# EAGLE board LED Wall Ver 3_1 (EAGLE 6.3)
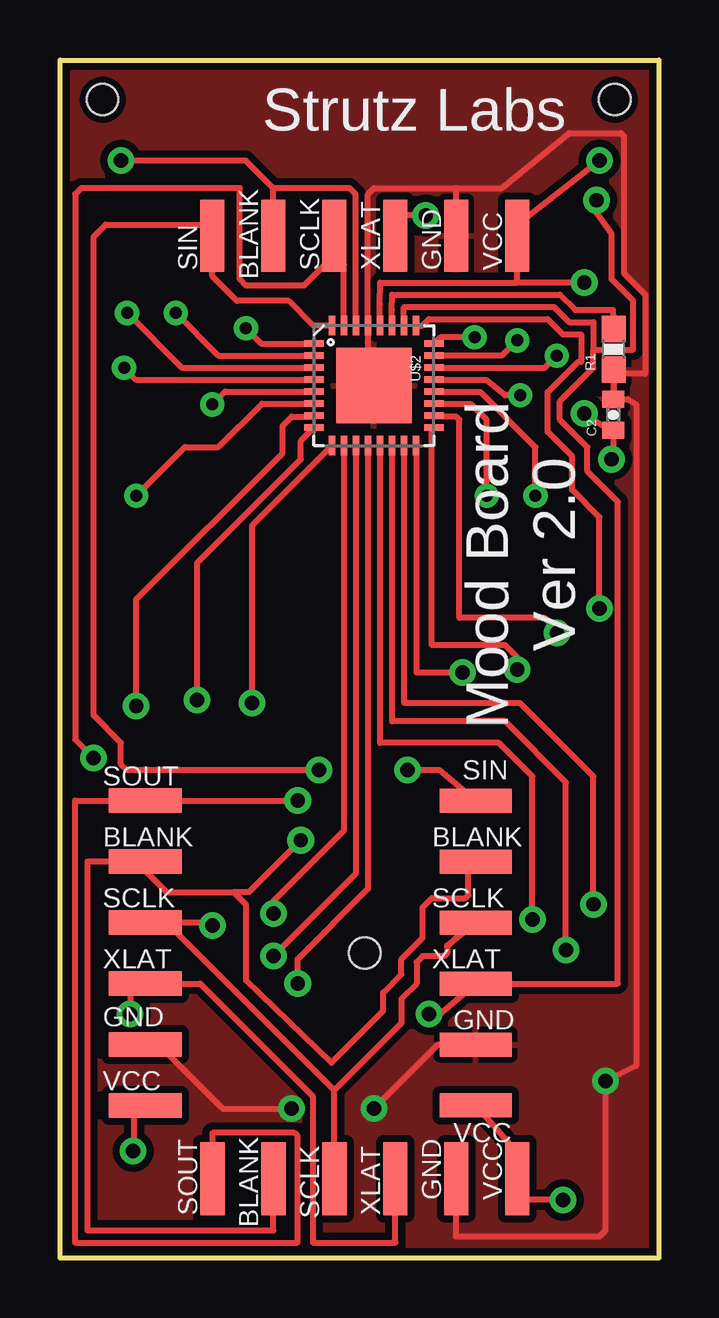
[diagram p0: board, top side]
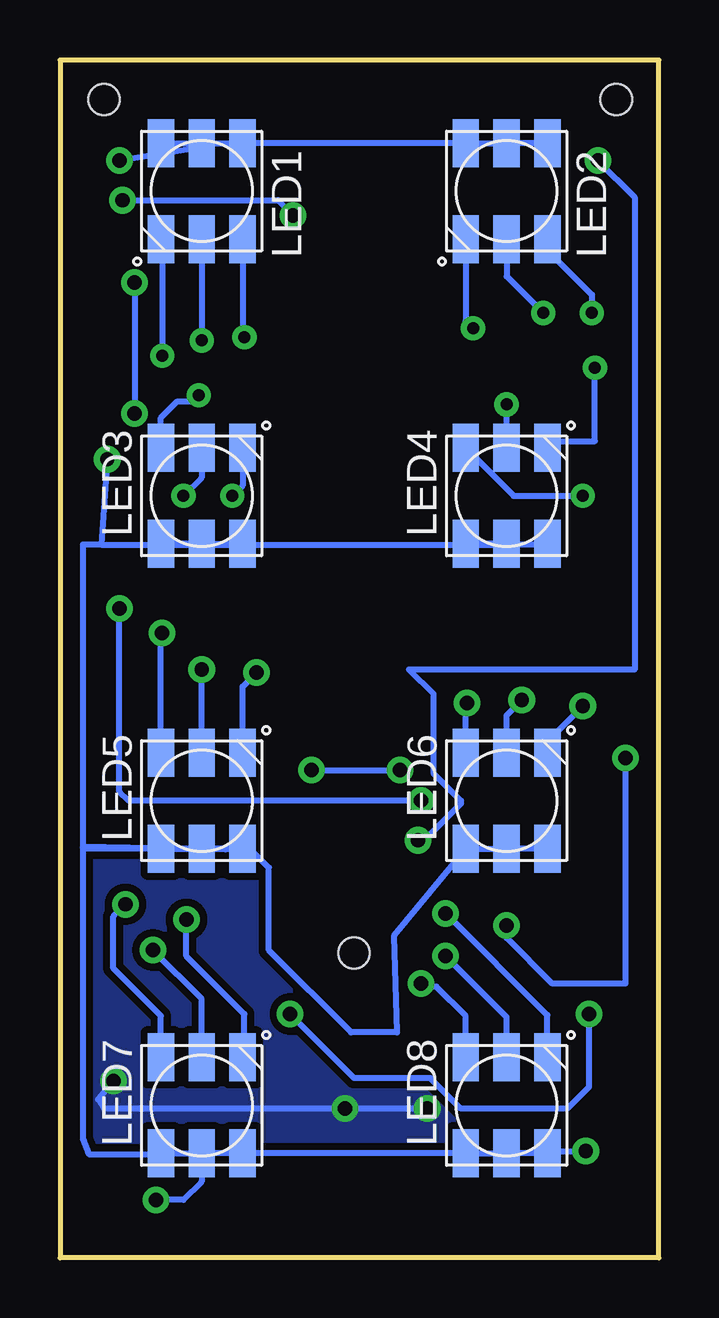
[diagram p1: board, bottom side, seen from below]

Size 24.96 x 49.91 mm. Coordinates in mm from the lower left corner, seen from the top.
Outline: 0,0 24.96,0 24.96,49.91 0,49.91 0,0
Copper layers (1*16): Top 0.035mm / dielectric 1.5mm / Bottom 0.035mm
Design rules "SparkFun": minimum track width 8mil, minimum drill 20mil, track to track 8mil, track to pad 8mil, pad to pad 8mil, via to via 8mil, smd to smd 8mil, copper to edge 8mil, drill to drill 8mil, minimum pad ring 12mil, minimum via ring 10mil, stop-mask expansion 4mil, vias tented up to drill 20mil, thermal gap 10mil
Holes 1.3 mm at 1.78,48.26 23.11,48.26 12.7,12.7

## Footprints (pad centres in the part's own frame; a part is rotated, then mirrored left to right if it is on the bottom)
0402-CAP = smd 0.7 x 0.9: 1 -0.65,0; 2 0.65,0
1X06_SMD = smd 3.048 x 1.016: P$1 0,-1.27; P$2 0,1.27; P$3 0,3.81; P$4 0,-3.81; P$5 0,-6.35; P$6 0,6.35
1X06-SMD = smd 1 x 3: 1 -6.35,5; 2 -3.81,5; 3 -1.27,5; 4 1.27,5; 5 3.81,5; 6 6.35,5
RGBLED5050 = smd 2 x 1.1: 1 -2,1.7; 2 -2,0; 3 -2,-1.7; 4 2,-1.7; 5 2,0; 6 2,1.7
0603-RES = smd 1.1 x 1: 1 -0.85,0; 2 0.85,0
QFN-32 = smd 0.285 x 0.8: 1 -1.75,-2.5; 2 -1.25,-2.5; 3 -0.75,-2.5; 4 -0.25,-2.5; 5 0.25,-2.5; 6 0.75,-2.5; 7 1.25,-2.5; 8 1.75,-2.5; 17 1.75,2.5; 18 1.25,2.5; 19 0.75,2.5; 20 0.25,2.5; 21 -0.25,2.5; 22 -0.75,2.5; 23 -1.25,2.5; 24 -1.75,2.5 | smd 0.8 x 0.285: 9 2.5,-1.75; 10 2.5,-1.25; 11 2.5,-0.75; 12 2.5,-0.25; 13 2.5,0.25; 14 2.5,0.75; 15 2.5,1.25; 16 2.5,1.75; 25 -2.5,1.75; 26 -2.5,1.25; 27 -2.5,0.75; 28 -2.5,0.25; 29 -2.5,-0.25; 30 -2.5,-0.75; 31 -2.5,-1.25; 32 -2.5,-1.75 | smd 3.15 x 3.15: EP 0,0

## Placement (x,y rotation side)
C2  0.1uF  [0402-CAP]  23.05,35.13 90 top
E$1  [1X06_SMD]  12.7,3.3 90 top
E$2  [1X06_SMD]  3.56,12.7 180 top
INPUT  [1X06-SMD]  12.32,12.7 270 top
INPUT1  [1X06-SMD]  12.7,37.59 0 top
LED1  RGBLED5050  [RGBLED5050]  19.05,44.45 270 bottom
LED2  RGBLED5050  [RGBLED5050]  6.35,44.45 270 bottom
LED3  RGBLED5050  [RGBLED5050]  19.05,31.75 90 bottom
LED4  RGBLED5050  [RGBLED5050]  6.35,31.75 90 bottom
LED5  RGBLED5050  [RGBLED5050]  19.05,19.05 90 bottom
LED6  RGBLED5050  [RGBLED5050]  6.35,19.05 90 bottom
LED7  RGBLED5050  [RGBLED5050]  19.05,6.35 90 bottom
LED8  RGBLED5050  [RGBLED5050]  6.35,6.35 90 bottom
R1  2.4k  [0603-RES]  23.06,37.86 90 top
U$2  TLC5947  [QFN-32]  13.08,36.35 270 top

## Library data of the parts
C2 = SparkFun; REFDES: R100
E$1 = Shannon; REFDES: J102
E$2 = Shannon; REFDES: J103
INPUT = SparkFun; REFDES: J101
INPUT1 = SparkFun; REFDES: J100
LED1 = adafruit; REFDES: D100
LED2 = adafruit; REFDES: D101
LED3 = adafruit; REFDES: D102
LED4 = adafruit; REFDES: D103
LED5 = adafruit; REFDES: D104
LED6 = adafruit; REFDES: D105
LED7 = adafruit; REFDES: D106
LED8 = adafruit; REFDES: D107
R1 = SparkFun-Resistors; REFDES: C100
U$2 = Shannon; REFDES: U100

## Nets
BLANK: INPUT1.2 INPUT.2 U$2.30
GND: C2.2 INPUT1.5 INPUT.5 R1.1 U$2.29 U$2.EP
N$4: LED2.4 U$2.1
N$5: LED2.5 U$2.2
N$7: LED2.6 U$2.3
N$8: LED8.4 U$2.10
N$10: LED4.5 U$2.5
N$17: LED4.4 U$2.4
N$18: LED4.6 U$2.6
N$19: LED6.4 U$2.7
N$20: LED6.5 U$2.8
N$21: LED6.6 U$2.9
N$22: LED8.5 U$2.11
N$23: LED8.6 U$2.12
N$24: LED7.4 U$2.13
N$25: LED7.5 U$2.14
N$26: LED7.6 U$2.15
N$27: LED5.4 U$2.16
N$28: LED5.5 U$2.17
N$29: LED5.6 U$2.18
N$30: LED3.4 U$2.19
N$31: R1.2 U$2.27
N$32: LED3.5 U$2.20
N$33: LED3.6 U$2.21
N$34: LED1.4 U$2.22
N$35: LED1.5 U$2.23
N$36: LED1.6 U$2.24
SCLK: INPUT1.3 INPUT.3 U$2.31
SIN: INPUT1.1 INPUT.1 U$2.32
SOUT: U$2.25
VCC: C2.1 INPUT1.6 INPUT.6 LED1.1 LED1.2 LED1.3 LED2.1 LED2.2 LED2.3 LED3.1 LED3.2 LED3.3 LED4.1 LED4.2 LED4.3 LED5.1 LED5.2 LED5.3 LED6.1 LED6.2 LED6.3 LED7.1 LED7.2 LED7.3 LED8.1 LED8.2 LED8.3 U$2.28
XLAT: INPUT1.4 INPUT.4 U$2.26

## Tracks (layer width: path | path; a pad name or v marks a point on that pad's centre or on a via)
BLANK  (via drill 0.6)
  Top 0.254: 8.89,3.1 8.89,1.14 1.14,1.14 1.14,16.51 3.17,16.51 4.45,15.24 7.24,15.24 | INPUT1.2 8.89,44.58 | U$2.30 12.32,44.32 12.06,44.58 8.89,44.58 | 7.24,15.24 7.75,14.73 7.75,11.56 11.3,8.13 13.46,10.29 13.46,11.05 14.22,11.81 14.22,12.45 15.11,13.34 15.11,14.61 15.49,14.99 16.89,14.99 17.02,15.11 17.02,16.44 INPUT.2 | 8.89,44.58 7.75,45.72 v2.54,45.72 | v10.03,17.4 7.87,15.24 7.24,15.24
  Bottom 0.254: v2.54,45.72 1.02,44.2 1.02,24.51 10.41,24.51 9.4,23.5 9.4,20.19 8.26,19.05 8.26,18.92 9.78,17.4 v10.03,17.4
GND  (via drill 0.6)
  Top 0.254: U$2.EP 12.83,36.6 U$2.29 12.83,44.33 13.08,44.58 16.51,44.58 | 4.11,8.89 6.78,6.22 v9.65,6.22 | 16.51,3.1 16.51,0.89 22.48,0.89 22.73,1.14 v22.73,7.37 24,8 24,35.56 23.66,35.78 C2.2 23.06,35.92 R1.1 23.11,36.83 24.38,36.83 24.38,40.13 23.5,41.02 23.5,46.74 23.37,46.86 21.21,46.86 18.41,44.58 16.51,44.58 | INPUT1.5 16.51,44.58 | INPUT.5 15.75,8.89 v13.08,6.22
  Bottom 0.254: v9.65,6.22 v13.08,6.22 23.11,6.22 23.37,6.6 v22.73,7.37
  pour Bottom (isolate 0.305): 0,49.91 0,0 24.96,0 24.96,49.91
  pour Top (isolate 0.305): 0,49.91 0,0 24.96,0 24.96,49.91
N$4  (via drill 0.5 pad 0.25)
  Top 0.254: v7.75,38.73 8.38,38.1 U$2.1
  Bottom 0.254: LED2.4 8.05,39.04 v7.75,38.73
N$5  (via drill 0.5 pad 0.25)
  Top 0.254: v4.83,39.37 6.6,37.6 U$2.2
  Bottom 0.254: LED2.5 6.35,40.89 v4.83,39.37
N$7  (via drill 0.5 pad 0.25)
  Top 0.254: v2.79,39.37 5.07,37.1 U$2.3
  Bottom 0.254: LED2.6 4.65,41.99 2.79,40.13 v2.79,39.37
N$8  (via drill 0.6)
  Top 0.254: U$2.10 11.83,17.8 8.89,14.86 v8.89,14.35
  Bottom 0.254: LED8.4 4.65,10.11 v8.89,14.35
N$10  (via drill 0.5 pad 0.25)
  Top 0.254: v6.35,35.56 6.89,36.1 U$2.5
  Bottom 0.254: LED4.5 v6.35,35.56
N$17  (via drill 0.5 pad 0.25)
  Top 0.254: v2.67,37.08 3.15,36.6 U$2.4
  Bottom 0.254: LED4.4 4.36,34.04 2.67,34.04 v2.67,37.08
N$18  (via drill 0.5 pad 0.25)
  Top 0.254: v3.17,31.75 5.21,33.78 6.6,33.78 8.42,35.6 U$2.6
  Bottom 0.254: LED4.6 6.05,31.75 v3.17,31.75
N$19  (via drill 0.6)
  Top 0.254: v3.17,22.99 3.17,27.43 9.27,33.53 9.27,34.67 9.65,35.05 10.54,35.05 U$2.7
  Bottom 0.254: LED6.4 4.65,21.51 v3.17,22.99
N$20  (via drill 0.6)
  Top 0.254: v5.71,23.24 5.71,28.96 10.03,33.27 10.03,34.05 U$2.8
  Bottom 0.254: LED6.5 6.35,22.61 v5.71,23.24
N$21  (via drill 0.6)
  Top 0.254: v8,23.11 8,30.52 U$2.9
  Bottom 0.254: LED6.6 8.05,23.07 v8,23.11
N$22  (via drill 0.6)
  Top 0.254: v8.89,12.57 12.33,16.01 U$2.11
  Bottom 0.254: LED8.5 6.35,10.03 v8.89,12.57
N$23  (via drill 0.6)
  Top 0.254: v9.91,11.43 9.91,12.45 12.83,15.37 U$2.12
  Bottom 0.254: LED8.6 8.05,10.08 9.27,11.3 9.78,11.3 v9.91,11.43
N$24  (via drill 0.6)
  Top 0.254: v19.68,14.1 19.68,20.07 18.29,21.46 13.34,21.46 U$2.13
  Bottom 0.254: LED7.4 17.27,8.43 17.27,10.16 19.68,12.57 v19.68,14.1
N$25  (via drill 0.6)
  Top 0.254: v21.08,12.83 21.08,19.81 18.54,22.35 13.84,22.35 13.84,33.84 U$2.14
  Bottom 0.254: LED7.5 19.05,10.79 v21.08,12.83
N$26  (via drill 0.6)
  Top 0.254: v22.23,14.73 22.23,20.07 19.18,23.11 14.35,23.11 14.35,33.83 U$2.15
  Bottom 0.254: LED7.6 20.75,10.08 22.73,12.06 22.73,14.22 v22.23,14.73
N$27  (via drill 0.6)
  Top 0.254: v16.76,24.38 14.86,24.38 14.86,33.82 U$2.16
  Bottom 0.254: LED5.4 17.35,23.8 v16.76,24.38
N$28  (via drill 0.6)
  Top 0.254: v19.05,24.51 19.05,25.02 18.54,25.53 15.49,25.53 15.49,34.51 U$2.17
  Bottom 0.254: LED5.5 v19.05,24.51
N$29  (via drill 0.6)
  Top 0.254: v20.7,26.04 20.7,26.16 20.19,26.67 16.64,26.67 16.64,34.92 16.51,35.05 15.63,35.05 U$2.18
  Bottom 0.254: LED5.6 20.75,25.99 v20.7,26.04
N$30  (via drill 0.5 pad 0.25)
  Top 0.254: v17.78,31.75 17.78,34.92 17.14,35.56 15.62,35.56 U$2.19
  Bottom 0.254: LED3.4 17.35,32.18 v17.78,31.75
N$31
  Top 0.254: U$2.27 13.83,39.48 13.84,40.13 20.83,40.13 21.46,39.5 23.04,39.5 R1.2
N$32  (via drill 0.5 pad 0.25)
  Top 0.254: v19.81,31.75 19.81,33.78 17.53,36.07 15.61,36.07 U$2.20
  Bottom 0.254: LED3.5 19.05,32.51 v19.81,31.75
N$33  (via drill 0.5 pad 0.25)
  Top 0.254: v19.18,35.94 18.54,35.94 17.78,36.58 15.6,36.58 U$2.21
  Bottom 0.254: LED3.6 20.75,35 20.07,35.69 19.43,35.69 v19.18,35.94
N$34  (via drill 0.5 pad 0.25)
  Top 0.254: U$2.22 15.59,37.08 20.19,37.08 v20.7,37.59
  Bottom 0.254: LED1.4 20.73,42.45 20.7,42.42 v20.7,37.59
N$35  (via drill 0.5 pad 0.25)
  Top 0.254: v19.05,38.23 18.41,37.59 U$2.23
  Bottom 0.254: LED1.5 v19.05,38.23
N$36  (via drill 0.5 pad 0.25)
  Top 0.254: v17.27,38.35 15.84,38.35 U$2.24
  Bottom 0.254: LED1.6 17.35,38.43 v17.27,38.35
SCLK  (via drill 0.6)
  Top 0.254: 16.13,12.95 16.13,13.01 INPUT.3 17.09,13.91 16.13,12.95 | 11.43,3.1 11.43,6.99 | 11.43,6.99 4.45,13.97 | 4.45,13.97 3.1,13.97 | INPUT1.3 11.43,41.78 | 11.43,41.78 10.16,40.51 7.75,40.51 7.49,40.77 7.49,44.58 0.89,44.58 0.64,44.32 0.64,21.59 v1.4,20.83 | v6.35,13.84 6.22,13.97 4.45,13.97 | 16.13,12.95 16.13,12.7 16,12.57 15.11,12.57 14.86,12.32 14.86,11.43 14.22,10.79 14.22,9.78 11.43,6.99 | U$2.31 11.83,41.38 11.43,41.78
  Bottom 0.254: v1.4,20.83 1.4,11.43 4.45,11.43 6.35,13.34 v6.35,13.84
SIN  (via drill 0.6)
  Top 0.254: U$2.32 10.56,38.85 9.53,39.88 7.37,39.88 6.35,40.89 INPUT1.1 6.35,43.05 1.91,43.05 1.4,42.55 1.4,22.61 2.54,21.46 2.54,20.57 2.79,20.32 v10.79,20.32 | INPUT.1 15.82,20.32 v14.48,20.32
  Bottom 0.254: v14.48,20.32 v10.79,20.32
SOUT  (via drill 0.6)
  Top 0.254: 6.35,3.1 6.35,5.21 9.78,5.21 9.91,5.08 9.91,0.64 0.64,0.64 0.64,19.05 3.1,19.05 v9.91,19.05 | U$2.25 15.1,38.85 15.37,39.12 20.32,39.12 20.95,38.48 21.72,38.48 21.72,37.34 21.59,37.34 20.32,36.07 20.32,34.42 21.34,33.4 21.34,32 22.48,30.86 v22.48,27.05
  Bottom 0.254: v9.91,19.05 22.1,19.05 22.48,19.43 v22.48,27.05
VCC  (via drill 0.6)
  Top 0.254: v3.05,4.45 3.1,4.49 3.1,6.35 | v20.95,2.41 19.05,2.41 19.05,4.39 INPUT.6 | v22.48,45.72 19.05,43.05 INPUT1.6 19.05,40.64 | U$2.28 13.33,39.75 13.34,40.64 19.05,40.64 | v21.84,35.18 23.05,34.35 C2.1 23.05,33.47 v22.99,33.27 | v21.84,40.64 19.05,40.64
  Bottom 0.254: LED6.3 LED6.2 LED6.1 11.05,13.42 10.92,9.4 12.83,9.4 16.26,12.83 16.26,16.26 17.05,17.05 LED5.3 | LED5.1 LED5.2 18.03,17.05 | 18.03,17.05 LED5.3 | LED3.1 LED3.2 LED3.3 17.38,29.72 | LED1.3 LED1.2 | LED2.2 6.27,46.45 6.27,46.46 LED2.2 | LED2.1 LED2.2 | LED4.1 LED4.2 6.32,29.72 | v3.05,4.45 4.55,4.45 LED8.3 LED8.2 LED8.1 LED7.3 LED7.2 | LED7.2 LED7.1 20.78,4.32 23.75,4.32 24,4.95 24,17.14 | 20.95,2.44 v20.95,2.41 19.81,2.41 19.05,3.17 LED7.2 | LED1.2 LED1.1 LED2.3 8.02,46.48 8,46.48 7.97,46.45 LED2.2 | LED1.2 19.27,46.23 v22.48,45.72 | v21.84,40.64 v21.84,35.18 | v22.99,33.27 23.24,29.72 | 23.24,29.72 17.38,29.72 | 17.38,29.72 6.32,29.72 | LED4.3 4.68,29.72 6.32,29.72 | 23.24,29.72 24,29.72 24,17.14 | 24,17.14 18.07,17.02 18.03,17.05 | LED5.3 23.97,17.05 24,17.14
XLAT  (via drill 0.6)
  Top 0.254: 13.97,3.1 13.97,0.64 10.54,0.64 10.54,6.73 5.84,11.43 2.92,11.43 v2.92,10.16 | U$2.26 14.33,39.6 14.35,39.62 20.57,39.62 21.21,38.99 22.23,38.99 22.23,37.85 | 22.23,37.85 23.88,37.85 23.88,39.88 22.99,40.77 22.99,42.67 22.35,43.56 v22.35,44.07 | v15.24,43.43 13.97,43.43 INPUT1.4 | v15.37,10.16 15.82,10.16 INPUT.4 23.24,11.43 23.24,31.5 21.97,32.77 21.97,33.78 20.83,34.92 20.83,35.69 22.23,37.08 22.23,37.85
  Bottom 0.254: v22.35,44.07 15.88,44.07 v15.24,43.43 | v2.92,10.16 2.92,7.11 3.81,6.22 8.26,6.22 9.53,7.49 12.7,7.49 v15.37,10.16

## Text on the board
_tsilk: Strutz Labs | SIN | BLANK | SCLK | XLAT | GND | VCC | Ver 2.0 | Mood Board | SOUT | SIN | BLANK | BLANK | SCLK | SCLK | XLAT | XLAT | GND | GND | VCC | VCC | SOUT | SCLK | XLAT | GND | VCC | BLANK